# EAGLE board Lid-v4-Panel (EAGLE 9.6.2)

Size 575.25 x 238.49 mm. Coordinates in mm from the lower left corner, seen from the top.
Outline: 6.83,176.4 5.81,180.94 18.23,183.58 17.18,188.55 16.96,189.54 16.65,191.03 13.48,205.94 1.06,203.3 0,208.27 26.01,230.37 26.48,230.77 arc-100 77.39,221.46 77.39,214.5 85.11,214.5 85.11,221.48 88.87,221.48
Outline: 6.83,176.4 48.23,176.4
Outline: 88.87,221.48 88.87,193.54
Outline: 88.87,193.54 85.11,193.54 85.11,200.53 77.39,200.53 77.39,193.57 arc-60 48.23,176.4
Outline: 32.23,202.69 32.23,198.95 39.47,198.95 39.47,191.18 32.23,191.18 32.23,187.45 60.17,187.45 60.17,191.18 52.93,191.18 52.93,198.95 60.17,198.95 60.17,202.69
Outline: 46.2,202.69 30.96,202.69 30.96,205.3 34.77,205.3 34.77,211.58 30.96,211.58 30.96,214.12 34.77,214.12 34.77,220.39 30.96,220.39 30.96,223.01 arc-90 38.58,230.63 arc-90 46.2,223.01
Outline: 46.2,223.01 46.2,220.39
Outline: 46.2,214.12 46.2,211.58
Outline: 46.2,205.3 46.2,202.69
Outline: 46.2,220.39 42.39,220.39 42.39,214.12 46.2,214.12
Outline: 46.2,211.58 42.39,211.58 42.39,205.3 46.2,205.3
Outline: 46.2,202.69 61.44,202.69 61.44,205.3 57.63,205.3 57.63,211.58 61.44,211.58 61.44,214.12 57.63,214.12 57.63,220.39 61.44,220.39 61.44,223.01 arc90 53.82,230.63 arc90 46.2,223.01
Outline: 46.2,205.3 50.01,205.3 50.01,211.58 46.2,211.58
Outline: 46.2,220.39 50.01,220.39 50.01,214.12 46.2,214.12
Outline: 170.91,176.4 171.93,180.94 159.51,183.58 160.57,188.55 160.78,189.54 161.1,191.03 164.26,205.94 176.69,203.3 177.74,208.27 151.74,230.37 151.26,230.77 arc100 100.35,221.46 100.35,214.5 92.63,214.5 92.63,221.48 88.87,221.48
Outline: 170.91,176.4 129.51,176.4
Outline: 88.87,193.54 92.63,193.54 92.63,200.53 100.35,200.53 100.35,193.57 arc60 129.51,176.4
Outline: 145.51,202.69 145.51,198.95 138.27,198.95 138.27,191.18 145.51,191.18 145.51,187.45 117.57,187.45 117.57,191.18 124.81,191.18 124.81,198.95 117.57,198.95 117.57,202.69
Outline: 106.02,207.64 71.73,207.64
Outline: 71.73,207.38 106.02,207.38
Outline: 131.54,202.69 146.78,202.69 146.78,205.3 142.97,205.3 142.97,211.58 146.78,211.58 146.78,214.12 142.97,214.12 142.97,220.39 146.78,220.39 146.78,223.01 arc90 139.16,230.63 arc90 131.54,223.01
Outline: 131.54,223.01 131.54,220.39
Outline: 131.54,214.12 131.54,211.58
Outline: 131.54,205.3 131.54,202.69
Outline: 131.54,220.39 135.35,220.39 135.35,214.12 131.54,214.12
Outline: 131.54,211.58 135.35,211.58 135.35,205.3 131.54,205.3
Outline: 131.54,202.69 116.3,202.69 116.3,205.3 120.11,205.3 120.11,211.58 116.3,211.58 116.3,214.12 120.11,214.12 120.11,220.39 116.3,220.39 116.3,223.01 arc-90 123.92,230.63 arc-90 131.54,223.01
Outline: 131.54,205.3 127.73,205.3 127.73,211.58 131.54,211.58
Outline: 131.54,220.39 127.73,220.39 127.73,214.12 131.54,214.12
Outline: 6.83,176.4 5.81,171.85 18.23,169.21 17.18,164.24 16.96,163.25 16.65,161.76 13.48,146.85 1.06,149.49 0,144.52 26.01,122.42 26.48,122.02 arc100 77.39,131.34 77.39,138.3 85.11,138.3 85.11,131.31 88.87,131.31
Outline: 88.87,131.31 88.87,159.25
Outline: 88.87,159.25 85.11,159.25 85.11,152.27 77.39,152.27 77.39,159.23 arc60 48.23,176.4
Outline: 32.23,150.11 32.23,153.84 39.47,153.84 39.47,161.61 32.23,161.61 32.23,165.35 60.17,165.35 60.17,161.61 52.93,161.61 52.93,153.84 60.17,153.84 60.17,150.11
Outline: 46.2,150.11 30.96,150.11 30.96,147.49 34.77,147.49 34.77,141.22 30.96,141.22 30.96,138.68 34.77,138.68 34.77,132.4 30.96,132.4 30.96,129.79 arc90 38.58,122.17 arc90 46.2,129.79
Outline: 46.2,129.79 46.2,132.4
Outline: 46.2,138.68 46.2,141.22
Outline: 46.2,147.49 46.2,150.11
Outline: 46.2,132.4 42.39,132.4 42.39,138.68 46.2,138.68
Outline: 46.2,141.22 42.39,141.22 42.39,147.49 46.2,147.49
Outline: 46.2,150.11 61.44,150.11 61.44,147.49 57.63,147.49 57.63,141.22 61.44,141.22 61.44,138.68 57.63,138.68 57.63,132.4 61.44,132.4 61.44,129.79 arc-90 53.82,122.17 arc-90 46.2,129.79
Outline: 46.2,147.49 50.01,147.49 50.01,141.22 46.2,141.22
Outline: 46.2,132.4 50.01,132.4 50.01,138.68 46.2,138.68
Outline: 170.91,176.4 171.93,171.85 159.51,169.21 160.57,164.24 160.78,163.25 161.1,161.76 164.26,146.85 176.69,149.49 177.74,144.52 151.74,122.42 151.26,122.02 arc-100 100.35,131.34 100.35,138.3 92.63,138.3 92.63,131.31 88.87,131.31
Outline: 88.87,159.25 92.63,159.25 92.63,152.27 100.35,152.27 100.35,159.23 arc-60 129.51,176.4
Outline: 145.51,150.11 145.51,153.84 138.27,153.84 138.27,161.61 145.51,161.61 145.51,165.35 117.57,165.35 117.57,161.61 124.81,161.61 124.81,153.84 117.57,153.84 117.57,150.11
Outline: 106.02,145.15 71.73,145.15
Outline: 71.73,145.41 106.02,145.41
Outline: 131.54,150.11 146.78,150.11 146.78,147.49 142.97,147.49 142.97,141.22 146.78,141.22 146.78,138.68 142.97,138.68 142.97,132.4 146.78,132.4 146.78,129.79 arc-90 139.16,122.17 arc-90 131.54,129.79
Outline: 131.54,129.79 131.54,132.4
Outline: 131.54,138.68 131.54,141.22
Outline: 131.54,147.49 131.54,150.11
Outline: 131.54,132.4 135.35,132.4 135.35,138.68 131.54,138.68
Outline: 131.54,141.22 135.35,141.22 135.35,147.49 131.54,147.49
Outline: 131.54,150.11 116.3,150.11 116.3,147.49 120.11,147.49 120.11,141.22 116.3,141.22 116.3,138.68 120.11,138.68 120.11,132.4 116.3,132.4 116.3,129.79 arc90 123.92,122.17 arc90 131.54,129.79
Outline: 131.54,147.49 127.73,147.49 127.73,141.22 131.54,141.22
Outline: 131.54,132.4 127.73,132.4 127.73,138.68 131.54,138.68
Outline: 184.63,176.4 183.61,180.94 196.03,183.58 194.98,188.55 194.76,189.54 194.45,191.03 191.28,205.94 178.86,203.3 177.8,208.27 203.81,230.37 204.28,230.77 arc-100 255.19,221.46 255.19,214.5 262.91,214.5 262.91,221.48 266.67,221.48
Outline: 184.63,176.4 226.03,176.4
Outline: 266.67,221.48 266.67,193.54
Outline: 266.67,193.54 262.91,193.54 262.91,200.53 255.19,200.53 255.19,193.57 arc-60 226.03,176.4
Outline: 210.03,202.69 210.03,198.95 217.27,198.95 217.27,191.18 210.03,191.18 210.03,187.45 237.97,187.45 237.97,191.18 230.73,191.18 230.73,198.95 237.97,198.95 237.97,202.69
Outline: 224,202.69 208.76,202.69 208.76,205.3 212.57,205.3 212.57,211.58 208.76,211.58 208.76,214.12 212.57,214.12 212.57,220.39 208.76,220.39 208.76,223.01 arc-90 216.38,230.63 arc-90 224,223.01
Outline: 224,223.01 224,220.39
Outline: 224,214.12 224,211.58
Outline: 224,205.3 224,202.69
Outline: 224,220.39 220.19,220.39 220.19,214.12 224,214.12
Outline: 224,211.58 220.19,211.58 220.19,205.3 224,205.3
Outline: 224,202.69 239.24,202.69 239.24,205.3 235.43,205.3 235.43,211.58 239.24,211.58 239.24,214.12 235.43,214.12 235.43,220.39 239.24,220.39 239.24,223.01 arc90 231.62,230.63 arc90 224,223.01
Outline: 224,205.3 227.81,205.3 227.81,211.58 224,211.58
Outline: 224,220.39 227.81,220.39 227.81,214.12 224,214.12
Outline: 348.71,176.4 349.73,180.94 337.31,183.58 338.37,188.55 338.58,189.54 338.9,191.03 342.06,205.94 354.49,203.3 355.54,208.27 329.54,230.37 329.06,230.77 arc100 278.15,221.46 278.15,214.5 270.43,214.5 270.43,221.48 266.67,221.48
Outline: 348.71,176.4 307.31,176.4
Outline: 266.67,193.54 270.43,193.54 270.43,200.53 278.15,200.53 278.15,193.57 arc60 307.31,176.4
Outline: 323.31,202.69 323.31,198.95 316.07,198.95 316.07,191.18 323.31,191.18 323.31,187.45 295.37,187.45 295.37,191.18 302.61,191.18 302.61,198.95 295.37,198.95 295.37,202.69
Outline: 283.82,207.64 249.53,207.64
Outline: 249.53,207.38 283.82,207.38
Outline: 309.34,202.69 324.58,202.69 324.58,205.3 320.77,205.3 320.77,211.58 324.58,211.58 324.58,214.12 320.77,214.12 320.77,220.39 324.58,220.39 324.58,223.01 arc90 316.96,230.63 arc90 309.34,223.01
Outline: 309.34,223.01 309.34,220.39
Outline: 309.34,214.12 309.34,211.58
Outline: 309.34,205.3 309.34,202.69
Outline: 309.34,220.39 313.15,220.39 313.15,214.12 309.34,214.12
Outline: 309.34,211.58 313.15,211.58 313.15,205.3 309.34,205.3
Outline: 309.34,202.69 294.1,202.69 294.1,205.3 297.91,205.3 297.91,211.58 294.1,211.58 294.1,214.12 297.91,214.12 297.91,220.39 294.1,220.39 294.1,223.01 arc-90 301.72,230.63 arc-90 309.34,223.01
Outline: 309.34,205.3 305.53,205.3 305.53,211.58 309.34,211.58
Outline: 309.34,220.39 305.53,220.39 305.53,214.12 309.34,214.12
Outline: 184.63,176.4 183.61,171.85 196.03,169.21 194.98,164.24 194.76,163.25 194.45,161.76 191.28,146.85 178.86,149.49 177.8,144.52 203.81,122.42 204.28,122.02 arc100 255.19,131.34 255.19,138.3 262.91,138.3 262.91,131.31 266.67,131.31
Outline: 266.67,131.31 266.67,159.25
Outline: 266.67,159.25 262.91,159.25 262.91,152.27 255.19,152.27 255.19,159.23 arc60 226.03,176.4
Outline: 210.03,150.11 210.03,153.84 217.27,153.84 217.27,161.61 210.03,161.61 210.03,165.35 237.97,165.35 237.97,161.61 230.73,161.61 230.73,153.84 237.97,153.84 237.97,150.11
Outline: 224,150.11 208.76,150.11 208.76,147.49 212.57,147.49 212.57,141.22 208.76,141.22 208.76,138.68 212.57,138.68 212.57,132.4 208.76,132.4 208.76,129.79 arc90 216.38,122.17 arc90 224,129.79
Outline: 224,129.79 224,132.4
Outline: 224,138.68 224,141.22
Outline: 224,147.49 224,150.11
Outline: 224,132.4 220.19,132.4 220.19,138.68 224,138.68
Outline: 224,141.22 220.19,141.22 220.19,147.49 224,147.49
Outline: 224,150.11 239.24,150.11 239.24,147.49 235.43,147.49 235.43,141.22 239.24,141.22 239.24,138.68 235.43,138.68 235.43,132.4 239.24,132.4 239.24,129.79 arc-90 231.62,122.17 arc-90 224,129.79
Outline: 224,147.49 227.81,147.49 227.81,141.22 224,141.22
Outline: 224,132.4 227.81,132.4 227.81,138.68 224,138.68
Outline: 348.71,176.4 349.73,171.85 337.31,169.21 338.37,164.24 338.58,163.25 338.9,161.76 342.06,146.85 354.49,149.49 355.54,144.52 329.54,122.42 329.06,122.02 arc-100 278.15,131.34 278.15,138.3 270.43,138.3 270.43,131.31 266.67,131.31
Outline: 266.67,159.25 270.43,159.25 270.43,152.27 278.15,152.27 278.15,159.23 arc-60 307.31,176.4
Outline: 323.31,150.11 323.31,153.84 316.07,153.84 316.07,161.61 323.31,161.61 323.31,165.35 295.37,165.35 295.37,161.61 302.61,161.61 302.61,153.84 295.37,153.84 295.37,150.11
Outline: 283.82,145.15 249.53,145.15
Outline: 249.53,145.41 283.82,145.41
Outline: 309.34,150.11 324.58,150.11 324.58,147.49 320.77,147.49 320.77,141.22 324.58,141.22 324.58,138.68 320.77,138.68 320.77,132.4 324.58,132.4 324.58,129.79 arc-90 316.96,122.17 arc-90 309.34,129.79
Outline: 309.34,129.79 309.34,132.4
Outline: 309.34,138.68 309.34,141.22
Outline: 309.34,147.49 309.34,150.11
Outline: 309.34,132.4 313.15,132.4 313.15,138.68 309.34,138.68
Outline: 309.34,141.22 313.15,141.22 313.15,147.49 309.34,147.49
Outline: 309.34,150.11 294.1,150.11 294.1,147.49 297.91,147.49 297.91,141.22 294.1,141.22 294.1,138.68 297.91,138.68 297.91,132.4 294.1,132.4 294.1,129.79 arc90 301.72,122.17 arc90 309.34,129.79
Outline: 309.34,147.49 305.53,147.49 305.53,141.22 309.34,141.22
Outline: 309.34,132.4 305.53,132.4 305.53,138.68 309.34,138.68
Outline: 362.43,176.4 361.41,180.94 373.83,183.58 372.78,188.55 372.56,189.54 372.25,191.03 369.08,205.94 356.66,203.3 355.6,208.27 381.61,230.37 382.08,230.77 arc-100 432.99,221.46 432.99,214.5 440.71,214.5 440.71,221.48 444.47,221.48
Outline: 362.43,176.4 403.83,176.4
Outline: 444.47,221.48 444.47,193.54
Outline: 444.47,193.54 440.71,193.54 440.71,200.53 432.99,200.53 432.99,193.57 arc-60 403.83,176.4
Outline: 387.83,202.69 387.83,198.95 395.07,198.95 395.07,191.18 387.83,191.18 387.83,187.45 415.77,187.45 415.77,191.18 408.53,191.18 408.53,198.95 415.77,198.95 415.77,202.69
Outline: 401.8,202.69 386.56,202.69 386.56,205.3 390.37,205.3 390.37,211.58 386.56,211.58 386.56,214.12 390.37,214.12 390.37,220.39 386.56,220.39 386.56,223.01 arc-90 394.18,230.63 arc-90 401.8,223.01
Outline: 401.8,223.01 401.8,220.39
Outline: 401.8,214.12 401.8,211.58
Outline: 401.8,205.3 401.8,202.69
Outline: 401.8,220.39 397.99,220.39 397.99,214.12 401.8,214.12
Outline: 401.8,211.58 397.99,211.58 397.99,205.3 401.8,205.3
Outline: 401.8,202.69 417.04,202.69 417.04,205.3 413.23,205.3 413.23,211.58 417.04,211.58 417.04,214.12 413.23,214.12 413.23,220.39 417.04,220.39 417.04,223.01 arc90 409.42,230.63 arc90 401.8,223.01
Outline: 401.8,205.3 405.61,205.3 405.61,211.58 401.8,211.58
Outline: 401.8,220.39 405.61,220.39 405.61,214.12 401.8,214.12
Outline: 526.51,176.4 527.53,180.94 515.11,183.58 516.17,188.55 516.38,189.54 516.7,191.03 519.86,205.94 532.29,203.3 533.34,208.27 507.34,230.37 506.86,230.77 arc100 455.95,221.46 455.95,214.5 448.23,214.5 448.23,221.48 444.47,221.48
Outline: 526.51,176.4 485.11,176.4
Outline: 444.47,193.54 448.23,193.54 448.23,200.53 455.95,200.53 455.95,193.57 arc60 485.11,176.4
Outline: 501.11,202.69 501.11,198.95 493.87,198.95 493.87,191.18 501.11,191.18 501.11,187.45 473.17,187.45 473.17,191.18 480.41,191.18 480.41,198.95 473.17,198.95 473.17,202.69
Outline: 461.62,207.64 427.33,207.64
Outline: 427.33,207.38 461.62,207.38
Outline: 487.14,202.69 502.38,202.69 502.38,205.3 498.57,205.3 498.57,211.58 502.38,211.58 502.38,214.12 498.57,214.12 498.57,220.39 502.38,220.39 502.38,223.01 arc90 494.76,230.63 arc90 487.14,223.01
Outline: 487.14,223.01 487.14,220.39
Outline: 487.14,214.12 487.14,211.58
Outline: 487.14,205.3 487.14,202.69
Outline: 487.14,220.39 490.95,220.39 490.95,214.12 487.14,214.12
Outline: 487.14,211.58 490.95,211.58 490.95,205.3 487.14,205.3
Outline: 487.14,202.69 471.9,202.69 471.9,205.3 475.71,205.3 475.71,211.58 471.9,211.58 471.9,214.12 475.71,214.12 475.71,220.39 471.9,220.39 471.9,223.01 arc-90 479.52,230.63 arc-90 487.14,223.01
Outline: 487.14,205.3 483.33,205.3 483.33,211.58 487.14,211.58
Outline: 487.14,220.39 483.33,220.39 483.33,214.12 487.14,214.12
Outline: 362.43,176.4 361.41,171.85 373.83,169.21 372.78,164.24 372.56,163.25 372.25,161.76 369.08,146.85 356.66,149.49 355.6,144.52 381.61,122.42 382.08,122.02 arc100 432.99,131.34 432.99,138.3 440.71,138.3 440.71,131.31 444.47,131.31
Outline: 444.47,131.31 444.47,159.25
Outline: 444.47,159.25 440.71,159.25 440.71,152.27 432.99,152.27 432.99,159.23 arc60 403.83,176.4
Outline: 387.83,150.11 387.83,153.84 395.07,153.84 395.07,161.61 387.83,161.61 387.83,165.35 415.77,165.35 415.77,161.61 408.53,161.61 408.53,153.84 415.77,153.84 415.77,150.11
Outline: 401.8,150.11 386.56,150.11 386.56,147.49 390.37,147.49 390.37,141.22 386.56,141.22 386.56,138.68 390.37,138.68 390.37,132.4 386.56,132.4 386.56,129.79 arc90 394.18,122.17 arc90 401.8,129.79
Outline: 401.8,129.79 401.8,132.4
Outline: 401.8,138.68 401.8,141.22
Outline: 401.8,147.49 401.8,150.11
Outline: 401.8,132.4 397.99,132.4 397.99,138.68 401.8,138.68
Outline: 401.8,141.22 397.99,141.22 397.99,147.49 401.8,147.49
Outline: 401.8,150.11 417.04,150.11 417.04,147.49 413.23,147.49 413.23,141.22 417.04,141.22 417.04,138.68 413.23,138.68 413.23,132.4 417.04,132.4 417.04,129.79 arc-90 409.42,122.17 arc-90 401.8,129.79
Outline: 401.8,147.49 405.61,147.49 405.61,141.22 401.8,141.22
Outline: 401.8,132.4 405.61,132.4 405.61,138.68 401.8,138.68
Outline: 526.51,176.4 527.53,171.85 515.11,169.21 516.17,164.24 516.38,163.25 516.7,161.76 519.86,146.85 532.29,149.49 533.34,144.52 507.34,122.42 506.86,122.02 arc-100 455.95,131.34 455.95,138.3 448.23,138.3 448.23,131.31 444.47,131.31
Outline: 444.47,159.25 448.23,159.25 448.23,152.27 455.95,152.27 455.95,159.23 arc-60 485.11,176.4
Outline: 501.11,150.11 501.11,153.84 493.87,153.84 493.87,161.61 501.11,161.61 501.11,165.35 473.17,165.35 473.17,161.61 480.41,161.61 480.41,153.84 473.17,153.84 473.17,150.11
Outline: 461.62,145.15 427.33,145.15
Outline: 427.33,145.41 461.62,145.41
Outline: 487.14,150.11 502.38,150.11 502.38,147.49 498.57,147.49 498.57,141.22 502.38,141.22 502.38,138.68 498.57,138.68 498.57,132.4 502.38,132.4 502.38,129.79 arc-90 494.76,122.17 arc-90 487.14,129.79
Outline: 487.14,129.79 487.14,132.4
Outline: 487.14,138.68 487.14,141.22
Outline: 487.14,147.49 487.14,150.11
Outline: 487.14,132.4 490.95,132.4 490.95,138.68 487.14,138.68
Outline: 487.14,141.22 490.95,141.22 490.95,147.49 487.14,147.49
Outline: 487.14,150.11 471.9,150.11 471.9,147.49 475.71,147.49 475.71,141.22 471.9,141.22 471.9,138.68 475.71,138.68 475.71,132.4 471.9,132.4 471.9,129.79 arc90 479.52,122.17 arc90 487.14,129.79
Outline: 487.14,147.49 483.33,147.49 483.33,141.22 487.14,141.22
Outline: 487.14,132.4 483.33,132.4 483.33,138.68 487.14,138.68
Outline: 48.74,62.1 47.72,66.64 60.14,69.28 59.09,74.25 58.87,75.24 58.56,76.73 55.39,91.64 42.97,89 41.91,93.97 67.92,116.07 68.39,116.47 arc-100 119.3,107.16 119.3,100.2 127.02,100.2 127.02,107.18 130.78,107.18
Outline: 48.74,62.1 90.14,62.1
Outline: 130.78,107.18 130.78,79.24
Outline: 130.78,79.24 127.02,79.24 127.02,86.23 119.3,86.23 119.3,79.27 arc-60 90.14,62.1
Outline: 74.14,88.39 74.14,84.65 81.38,84.65 81.38,76.88 74.14,76.88 74.14,73.15 102.08,73.15 102.08,76.88 94.84,76.88 94.84,84.65 102.08,84.65 102.08,88.39
Outline: 88.11,88.39 72.87,88.39 72.87,91 76.68,91 76.68,97.28 72.87,97.28 72.87,99.82 76.68,99.82 76.68,106.09 72.87,106.09 72.87,108.71 arc-90 80.49,116.33 arc-90 88.11,108.71
Outline: 88.11,108.71 88.11,106.09
Outline: 88.11,99.82 88.11,97.28
Outline: 88.11,91 88.11,88.39
Outline: 88.11,106.09 84.3,106.09 84.3,99.82 88.11,99.82
Outline: 88.11,97.28 84.3,97.28 84.3,91 88.11,91
Outline: 88.11,88.39 103.35,88.39 103.35,91 99.54,91 99.54,97.28 103.35,97.28 103.35,99.82 99.54,99.82 99.54,106.09 103.35,106.09 103.35,108.71 arc90 95.73,116.33 arc90 88.11,108.71
Outline: 88.11,91 91.92,91 91.92,97.28 88.11,97.28
Outline: 88.11,106.09 91.92,106.09 91.92,99.82 88.11,99.82
Outline: 212.82,62.1 213.84,66.64 201.42,69.28 202.48,74.25 202.69,75.24 203.01,76.73 206.17,91.64 218.6,89 219.65,93.97 193.65,116.07 193.17,116.47 arc100 142.26,107.16 142.26,100.2 134.54,100.2 134.54,107.18 130.78,107.18
Outline: 212.82,62.1 171.42,62.1
Outline: 130.78,79.24 134.54,79.24 134.54,86.23 142.26,86.23 142.26,79.27 arc60 171.42,62.1
Outline: 187.42,88.39 187.42,84.65 180.18,84.65 180.18,76.88 187.42,76.88 187.42,73.15 159.48,73.15 159.48,76.88 166.72,76.88 166.72,84.65 159.48,84.65 159.48,88.39
Outline: 147.93,93.34 113.64,93.34
Outline: 113.64,93.08 147.93,93.08
Outline: 173.45,88.39 188.69,88.39 188.69,91 184.88,91 184.88,97.28 188.69,97.28 188.69,99.82 184.88,99.82 184.88,106.09 188.69,106.09 188.69,108.71 arc90 181.07,116.33 arc90 173.45,108.71
Outline: 173.45,108.71 173.45,106.09
Outline: 173.45,99.82 173.45,97.28
Outline: 173.45,91 173.45,88.39
Outline: 173.45,106.09 177.26,106.09 177.26,99.82 173.45,99.82
Outline: 173.45,97.28 177.26,97.28 177.26,91 173.45,91
Outline: 173.45,88.39 158.21,88.39 158.21,91 162.02,91 162.02,97.28 158.21,97.28 158.21,99.82 162.02,99.82 162.02,106.09 158.21,106.09 158.21,108.71 arc-90 165.83,116.33 arc-90 173.45,108.71
Outline: 173.45,91 169.64,91 169.64,97.28 173.45,97.28
Outline: 173.45,106.09 169.64,106.09 169.64,99.82 173.45,99.82
Outline: 48.74,62.1 47.72,57.55 60.14,54.91 59.09,49.94 58.87,48.95 58.56,47.46 55.39,32.55 42.97,35.19 41.91,30.22 67.92,8.12 68.39,7.72 arc100 119.3,17.04 119.3,24 127.02,24 127.02,17.01 130.78,17.01
Outline: 130.78,17.01 130.78,44.95
Outline: 130.78,44.95 127.02,44.95 127.02,37.97 119.3,37.97 119.3,44.93 arc60 90.14,62.1
Outline: 74.14,35.81 74.14,39.54 81.38,39.54 81.38,47.31 74.14,47.31 74.14,51.05 102.08,51.05 102.08,47.31 94.84,47.31 94.84,39.54 102.08,39.54 102.08,35.81
Outline: 88.11,35.81 72.87,35.81 72.87,33.19 76.68,33.19 76.68,26.92 72.87,26.92 72.87,24.38 76.68,24.38 76.68,18.1 72.87,18.1 72.87,15.49 arc90 80.49,7.87 arc90 88.11,15.49
Outline: 88.11,15.49 88.11,18.1
Outline: 88.11,24.38 88.11,26.92
Outline: 88.11,33.19 88.11,35.81
Outline: 88.11,18.1 84.3,18.1 84.3,24.38 88.11,24.38
Outline: 88.11,26.92 84.3,26.92 84.3,33.19 88.11,33.19
Outline: 88.11,35.81 103.35,35.81 103.35,33.19 99.54,33.19 99.54,26.92 103.35,26.92 103.35,24.38 99.54,24.38 99.54,18.1 103.35,18.1 103.35,15.49 arc-90 95.73,7.87 arc-90 88.11,15.49
Outline: 88.11,33.19 91.92,33.19 91.92,26.92 88.11,26.92
Outline: 88.11,18.1 91.92,18.1 91.92,24.38 88.11,24.38
Outline: 212.82,62.1 213.84,57.55 201.42,54.91 202.48,49.94 202.69,48.95 203.01,47.46 206.17,32.55 218.6,35.19 219.65,30.22 193.65,8.12 193.17,7.72 arc-100 142.26,17.04 142.26,24 134.54,24 134.54,17.01 130.78,17.01
Outline: 130.78,44.95 134.54,44.95 134.54,37.97 142.26,37.97 142.26,44.93 arc-60 171.42,62.1
Outline: 187.42,35.81 187.42,39.54 180.18,39.54 180.18,47.31 187.42,47.31 187.42,51.05 159.48,51.05 159.48,47.31 166.72,47.31 166.72,39.54 159.48,39.54 159.48,35.81
Outline: 147.93,30.85 113.64,30.85
Outline: 113.64,31.11 147.93,31.11
Outline: 173.45,35.81 188.69,35.81 188.69,33.19 184.88,33.19 184.88,26.92 188.69,26.92 188.69,24.38 184.88,24.38 184.88,18.1 188.69,18.1 188.69,15.49 arc-90 181.07,7.87 arc-90 173.45,15.49
Outline: 173.45,15.49 173.45,18.1
Outline: 173.45,24.38 173.45,26.92
Outline: 173.45,33.19 173.45,35.81
Outline: 173.45,18.1 177.26,18.1 177.26,24.38 173.45,24.38
Outline: 173.45,26.92 177.26,26.92 177.26,33.19 173.45,33.19
Outline: 173.45,35.81 158.21,35.81 158.21,33.19 162.02,33.19 162.02,26.92 158.21,26.92 158.21,24.38 162.02,24.38 162.02,18.1 158.21,18.1 158.21,15.49 arc90 165.83,7.87 arc90 173.45,15.49
Outline: 173.45,33.19 169.64,33.19 169.64,26.92 173.45,26.92
Outline: 173.45,18.1 169.64,18.1 169.64,24.38 173.45,24.38
Outline: 226.54,62.1 225.52,66.64 237.94,69.28 236.89,74.25 236.67,75.24 236.36,76.73 233.19,91.64 220.77,89 219.71,93.97 245.72,116.07 246.19,116.47 arc-100 297.1,107.16 297.1,100.2 304.82,100.2 304.82,107.18 308.58,107.18
Outline: 226.54,62.1 267.94,62.1
Outline: 308.58,107.18 308.58,79.24
Outline: 308.58,79.24 304.82,79.24 304.82,86.23 297.1,86.23 297.1,79.27 arc-60 267.94,62.1
Outline: 251.94,88.39 251.94,84.65 259.18,84.65 259.18,76.88 251.94,76.88 251.94,73.15 279.88,73.15 279.88,76.88 272.64,76.88 272.64,84.65 279.88,84.65 279.88,88.39
Outline: 265.91,88.39 250.67,88.39 250.67,91 254.48,91 254.48,97.28 250.67,97.28 250.67,99.82 254.48,99.82 254.48,106.09 250.67,106.09 250.67,108.71 arc-90 258.29,116.33 arc-90 265.91,108.71
Outline: 265.91,108.71 265.91,106.09
Outline: 265.91,99.82 265.91,97.28
Outline: 265.91,91 265.91,88.39
Outline: 265.91,106.09 262.1,106.09 262.1,99.82 265.91,99.82
Outline: 265.91,97.28 262.1,97.28 262.1,91 265.91,91
Outline: 265.91,88.39 281.15,88.39 281.15,91 277.34,91 277.34,97.28 281.15,97.28 281.15,99.82 277.34,99.82 277.34,106.09 281.15,106.09 281.15,108.71 arc90 273.53,116.33 arc90 265.91,108.71
Outline: 265.91,91 269.72,91 269.72,97.28 265.91,97.28
Outline: 265.91,106.09 269.72,106.09 269.72,99.82 265.91,99.82
Outline: 390.62,62.1 391.64,66.64 379.22,69.28 380.28,74.25 380.49,75.24 380.81,76.73 383.97,91.64 396.4,89 397.45,93.97 371.45,116.07 370.97,116.47 arc100 320.06,107.16 320.06,100.2 312.34,100.2 312.34,107.18 308.58,107.18
Outline: 390.62,62.1 349.22,62.1
Outline: 308.58,79.24 312.34,79.24 312.34,86.23 320.06,86.23 320.06,79.27 arc60 349.22,62.1
Outline: 365.22,88.39 365.22,84.65 357.98,84.65 357.98,76.88 365.22,76.88 365.22,73.15 337.28,73.15 337.28,76.88 344.52,76.88 344.52,84.65 337.28,84.65 337.28,88.39
Outline: 325.73,93.34 291.44,93.34
Outline: 291.44,93.08 325.73,93.08
Outline: 351.25,88.39 366.49,88.39 366.49,91 362.68,91 362.68,97.28 366.49,97.28 366.49,99.82 362.68,99.82 362.68,106.09 366.49,106.09 366.49,108.71 arc90 358.87,116.33 arc90 351.25,108.71
Outline: 351.25,108.71 351.25,106.09
Outline: 351.25,99.82 351.25,97.28
Outline: 351.25,91 351.25,88.39
Outline: 351.25,106.09 355.06,106.09 355.06,99.82 351.25,99.82
Outline: 351.25,97.28 355.06,97.28 355.06,91 351.25,91
Outline: 351.25,88.39 336.01,88.39 336.01,91 339.82,91 339.82,97.28 336.01,97.28 336.01,99.82 339.82,99.82 339.82,106.09 336.01,106.09 336.01,108.71 arc-90 343.63,116.33 arc-90 351.25,108.71
Outline: 351.25,91 347.44,91 347.44,97.28 351.25,97.28
Outline: 351.25,106.09 347.44,106.09 347.44,99.82 351.25,99.82
Outline: 226.54,62.1 225.52,57.55 237.94,54.91 236.89,49.94 236.67,48.95 236.36,47.46 233.19,32.55 220.77,35.19 219.71,30.22 245.72,8.12 246.19,7.72 arc100 297.1,17.04 297.1,24 304.82,24 304.82,17.01 308.58,17.01
Outline: 308.58,17.01 308.58,44.95
Outline: 308.58,44.95 304.82,44.95 304.82,37.97 297.1,37.97 297.1,44.93 arc60 267.94,62.1
Outline: 251.94,35.81 251.94,39.54 259.18,39.54 259.18,47.31 251.94,47.31 251.94,51.05 279.88,51.05 279.88,47.31 272.64,47.31 272.64,39.54 279.88,39.54 279.88,35.81
Outline: 265.91,35.81 250.67,35.81 250.67,33.19 254.48,33.19 254.48,26.92 250.67,26.92 250.67,24.38 254.48,24.38 254.48,18.1 250.67,18.1 250.67,15.49 arc90 258.29,7.87 arc90 265.91,15.49
Outline: 265.91,15.49 265.91,18.1
Outline: 265.91,24.38 265.91,26.92
Outline: 265.91,33.19 265.91,35.81
Outline: 265.91,18.1 262.1,18.1 262.1,24.38 265.91,24.38
Outline: 265.91,26.92 262.1,26.92 262.1,33.19 265.91,33.19
Outline: 265.91,35.81 281.15,35.81 281.15,33.19 277.34,33.19 277.34,26.92 281.15,26.92 281.15,24.38 277.34,24.38 277.34,18.1 281.15,18.1 281.15,15.49 arc-90 273.53,7.87 arc-90 265.91,15.49
Outline: 265.91,33.19 269.72,33.19 269.72,26.92 265.91,26.92
Outline: 265.91,18.1 269.72,18.1 269.72,24.38 265.91,24.38
Outline: 390.62,62.1 391.64,57.55 379.22,54.91 380.28,49.94 380.49,48.95 380.81,47.46 383.97,32.55 396.4,35.19 397.45,30.22 371.45,8.12 370.97,7.72 arc-100 320.06,17.04 320.06,24 312.34,24 312.34,17.01 308.58,17.01
Outline: 308.58,44.95 312.34,44.95 312.34,37.97 320.06,37.97 320.06,44.93 arc-60 349.22,62.1
Outline: 365.22,35.81 365.22,39.54 357.98,39.54 357.98,47.31 365.22,47.31 365.22,51.05 337.28,51.05 337.28,47.31 344.52,47.31 344.52,39.54 337.28,39.54 337.28,35.81
Outline: 325.73,30.85 291.44,30.85
Outline: 291.44,31.11 325.73,31.11
Outline: 351.25,35.81 366.49,35.81 366.49,33.19 362.68,33.19 362.68,26.92 366.49,26.92 366.49,24.38 362.68,24.38 362.68,18.1 366.49,18.1 366.49,15.49 arc-90 358.87,7.87 arc-90 351.25,15.49
Outline: 351.25,15.49 351.25,18.1
Outline: 351.25,24.38 351.25,26.92
Outline: 351.25,33.19 351.25,35.81
Outline: 351.25,18.1 355.06,18.1 355.06,24.38 351.25,24.38
Outline: 351.25,26.92 355.06,26.92 355.06,33.19 351.25,33.19
Outline: 351.25,35.81 336.01,35.81 336.01,33.19 339.82,33.19 339.82,26.92 336.01,26.92 336.01,24.38 339.82,24.38 339.82,18.1 336.01,18.1 336.01,15.49 arc90 343.63,7.87 arc90 351.25,15.49
Outline: 351.25,33.19 347.44,33.19 347.44,26.92 351.25,26.92
Outline: 351.25,18.1 347.44,18.1 347.44,24.38 351.25,24.38
Outline: 404.34,62.1 403.32,66.64 415.74,69.28 414.69,74.25 414.47,75.24 414.16,76.73 410.99,91.64 398.57,89 397.51,93.97 423.52,116.07 423.99,116.47 arc-100 474.9,107.16 474.9,100.2 482.62,100.2 482.62,107.18 486.38,107.18
Outline: 404.34,62.1 445.74,62.1
Outline: 486.38,107.18 486.38,79.24
Outline: 486.38,79.24 482.62,79.24 482.62,86.23 474.9,86.23 474.9,79.27 arc-60 445.74,62.1
Outline: 429.74,88.39 429.74,84.65 436.98,84.65 436.98,76.88 429.74,76.88 429.74,73.15 457.68,73.15 457.68,76.88 450.44,76.88 450.44,84.65 457.68,84.65 457.68,88.39
Outline: 443.71,88.39 428.47,88.39 428.47,91 432.28,91 432.28,97.28 428.47,97.28 428.47,99.82 432.28,99.82 432.28,106.09 428.47,106.09 428.47,108.71 arc-90 436.09,116.33 arc-90 443.71,108.71
Outline: 443.71,108.71 443.71,106.09
Outline: 443.71,99.82 443.71,97.28
Outline: 443.71,91 443.71,88.39
Outline: 443.71,106.09 439.9,106.09 439.9,99.82 443.71,99.82
Outline: 443.71,97.28 439.9,97.28 439.9,91 443.71,91
Outline: 443.71,88.39 458.95,88.39 458.95,91 455.14,91 455.14,97.28 458.95,97.28 458.95,99.82 455.14,99.82 455.14,106.09 458.95,106.09 458.95,108.71 arc90 451.33,116.33 arc90 443.71,108.71
Outline: 443.71,91 447.52,91 447.52,97.28 443.71,97.28
Outline: 443.71,106.09 447.52,106.09 447.52,99.82 443.71,99.82
Outline: 568.42,62.1 569.44,66.64 557.02,69.28 558.08,74.25 558.29,75.24 558.61,76.73 561.77,91.64 574.2,89 575.25,93.97 549.25,116.07 548.77,116.47 arc100 497.86,107.16 497.86,100.2 490.14,100.2 490.14,107.18 486.38,107.18
Outline: 568.42,62.1 527.02,62.1
Outline: 486.38,79.24 490.14,79.24 490.14,86.23 497.86,86.23 497.86,79.27 arc60 527.02,62.1
Outline: 543.02,88.39 543.02,84.65 535.78,84.65 535.78,76.88 543.02,76.88 543.02,73.15 515.08,73.15 515.08,76.88 522.32,76.88 522.32,84.65 515.08,84.65 515.08,88.39
Outline: 503.53,93.34 469.24,93.34
Outline: 469.24,93.08 503.53,93.08
Outline: 529.05,88.39 544.29,88.39 544.29,91 540.48,91 540.48,97.28 544.29,97.28 544.29,99.82 540.48,99.82 540.48,106.09 544.29,106.09 544.29,108.71 arc90 536.67,116.33 arc90 529.05,108.71
Outline: 529.05,108.71 529.05,106.09
Outline: 529.05,99.82 529.05,97.28
Outline: 529.05,91 529.05,88.39
Outline: 529.05,106.09 532.86,106.09 532.86,99.82 529.05,99.82
Outline: 529.05,97.28 532.86,97.28 532.86,91 529.05,91
Outline: 529.05,88.39 513.81,88.39 513.81,91 517.62,91 517.62,97.28 513.81,97.28 513.81,99.82 517.62,99.82 517.62,106.09 513.81,106.09 513.81,108.71 arc-90 521.43,116.33 arc-90 529.05,108.71
Outline: 529.05,91 525.24,91 525.24,97.28 529.05,97.28
Outline: 529.05,106.09 525.24,106.09 525.24,99.82 529.05,99.82
Outline: 404.34,62.1 403.32,57.55 415.74,54.91 414.69,49.94 414.47,48.95 414.16,47.46 410.99,32.55 398.57,35.19 397.51,30.22 423.52,8.12 423.99,7.72 arc100 474.9,17.04 474.9,24 482.62,24 482.62,17.01 486.38,17.01
Outline: 486.38,17.01 486.38,44.95
Outline: 486.38,44.95 482.62,44.95 482.62,37.97 474.9,37.97 474.9,44.93 arc60 445.74,62.1
Outline: 429.74,35.81 429.74,39.54 436.98,39.54 436.98,47.31 429.74,47.31 429.74,51.05 457.68,51.05 457.68,47.31 450.44,47.31 450.44,39.54 457.68,39.54 457.68,35.81
Outline: 443.71,35.81 428.47,35.81 428.47,33.19 432.28,33.19 432.28,26.92 428.47,26.92 428.47,24.38 432.28,24.38 432.28,18.1 428.47,18.1 428.47,15.49 arc90 436.09,7.87 arc90 443.71,15.49
Outline: 443.71,15.49 443.71,18.1
Outline: 443.71,24.38 443.71,26.92
Outline: 443.71,33.19 443.71,35.81
Outline: 443.71,18.1 439.9,18.1 439.9,24.38 443.71,24.38
Outline: 443.71,26.92 439.9,26.92 439.9,33.19 443.71,33.19
Outline: 443.71,35.81 458.95,35.81 458.95,33.19 455.14,33.19 455.14,26.92 458.95,26.92 458.95,24.38 455.14,24.38 455.14,18.1 458.95,18.1 458.95,15.49 arc-90 451.33,7.87 arc-90 443.71,15.49
Outline: 443.71,33.19 447.52,33.19 447.52,26.92 443.71,26.92
Outline: 443.71,18.1 447.52,18.1 447.52,24.38 443.71,24.38
Outline: 568.42,62.1 569.44,57.55 557.02,54.91 558.08,49.94 558.29,48.95 558.61,47.46 561.77,32.55 574.2,35.19 575.25,30.22 549.25,8.12 548.77,7.72 arc-100 497.86,17.04 497.86,24 490.14,24 490.14,17.01 486.38,17.01
Outline: 486.38,44.95 490.14,44.95 490.14,37.97 497.86,37.97 497.86,44.93 arc-60 527.02,62.1
Outline: 543.02,35.81 543.02,39.54 535.78,39.54 535.78,47.31 543.02,47.31 543.02,51.05 515.08,51.05 515.08,47.31 522.32,47.31 522.32,39.54 515.08,39.54 515.08,35.81
Outline: 503.53,30.85 469.24,30.85
Outline: 469.24,31.11 503.53,31.11
Outline: 529.05,35.81 544.29,35.81 544.29,33.19 540.48,33.19 540.48,26.92 544.29,26.92 544.29,24.38 540.48,24.38 540.48,18.1 544.29,18.1 544.29,15.49 arc-90 536.67,7.87 arc-90 529.05,15.49
Outline: 529.05,15.49 529.05,18.1
Outline: 529.05,24.38 529.05,26.92
Outline: 529.05,33.19 529.05,35.81
Outline: 529.05,18.1 532.86,18.1 532.86,24.38 529.05,24.38
Outline: 529.05,26.92 532.86,26.92 532.86,33.19 529.05,33.19
Outline: 529.05,35.81 513.81,35.81 513.81,33.19 517.62,33.19 517.62,26.92 513.81,26.92 513.81,24.38 517.62,24.38 517.62,18.1 513.81,18.1 513.81,15.49 arc90 521.43,7.87 arc90 529.05,15.49
Outline: 529.05,33.19 525.24,33.19 525.24,26.92 529.05,26.92
Outline: 529.05,18.1 525.24,18.1 525.24,24.38 529.05,24.38
Outline: circle at 46.33,207.51 radius 25.93
Outline: circle at 38.58,224.28 radius 1.52
Outline: circle at 38.58,212.85 radius 1.4
Outline: circle at 53.82,224.28 radius 1.52
Outline: circle at 53.82,212.85 radius 1.4
Outline: circle at 131.42,207.51 radius 25.93
Outline: circle at 139.16,224.28 radius 1.52
Outline: circle at 139.16,212.85 radius 1.4
Outline: circle at 123.92,224.28 radius 1.52
Outline: circle at 123.92,212.85 radius 1.4
Outline: circle at 46.33,145.28 radius 25.93
Outline: circle at 38.58,128.52 radius 1.52
Outline: circle at 38.58,139.95 radius 1.4
Outline: circle at 53.82,128.52 radius 1.52
Outline: circle at 53.82,139.95 radius 1.4
Outline: circle at 131.42,145.28 radius 25.93
Outline: circle at 139.16,128.52 radius 1.52
Outline: circle at 139.16,139.95 radius 1.4
Outline: circle at 123.92,128.52 radius 1.52
Outline: circle at 123.92,139.95 radius 1.4
Copper layers (1*16): Top 0.035mm / dielectric 0.15mm / Bottom 0.035mm
Design rules "default": minimum track width 6mil, minimum drill 0.35mm, track to track 6mil, track to pad 6mil, pad to pad 6mil, via to via 6mil, smd to smd 6mil, copper to edge 40mil, drill to drill 6mil, minimum pad ring 10mil, minimum via ring 8mil, stop-mask expansion 4mil, vias tented up to drill 0mil, thermal gap 10mil

## Placement (x,y rotation side)
E$1  [MICRO_SERVO]  168.02,193.42 102 bottom
E$2  [MICRO_SERVO]  9.72,193.42 102 top
E$3  [MICRO_SERVO]  9.72,159.38 282 bottom
E$4  [MICRO_SERVO]  168.02,159.38 282 top
E$5  [MICRO_SERVO]  187.52,193.42 102 top
E$6  [MICRO_SERVO]  345.82,193.42 102 bottom
E$7  [MICRO_SERVO]  187.52,159.38 282 bottom
E$8  [MICRO_SERVO]  345.82,159.38 282 top
E$9  [MICRO_SERVO]  365.32,193.42 102 top
E$10  [MICRO_SERVO]  523.62,193.42 102 bottom
E$11  [MICRO_SERVO]  365.32,159.38 282 bottom
E$12  [MICRO_SERVO]  523.62,159.38 282 top
E$13  [MICRO_SERVO]  51.63,79.12 102 top
E$14  [MICRO_SERVO]  209.93,79.12 102 bottom
E$15  [MICRO_SERVO]  51.63,45.08 282 bottom
E$16  [MICRO_SERVO]  209.93,45.08 282 top
E$17  [MICRO_SERVO]  229.43,79.12 102 top
E$18  [MICRO_SERVO]  387.73,79.12 102 bottom
E$19  [MICRO_SERVO]  229.43,45.08 282 bottom
E$20  [MICRO_SERVO]  387.73,45.08 282 top
E$21  [MICRO_SERVO]  407.23,79.12 102 top
E$22  [MICRO_SERVO]  565.53,79.12 102 bottom
E$23  [MICRO_SERVO]  407.23,45.08 282 bottom
E$24  [MICRO_SERVO]  565.53,45.08 282 top

## Library data of the parts
E$1-E$24 = lid